# Allegro board DDS.brd
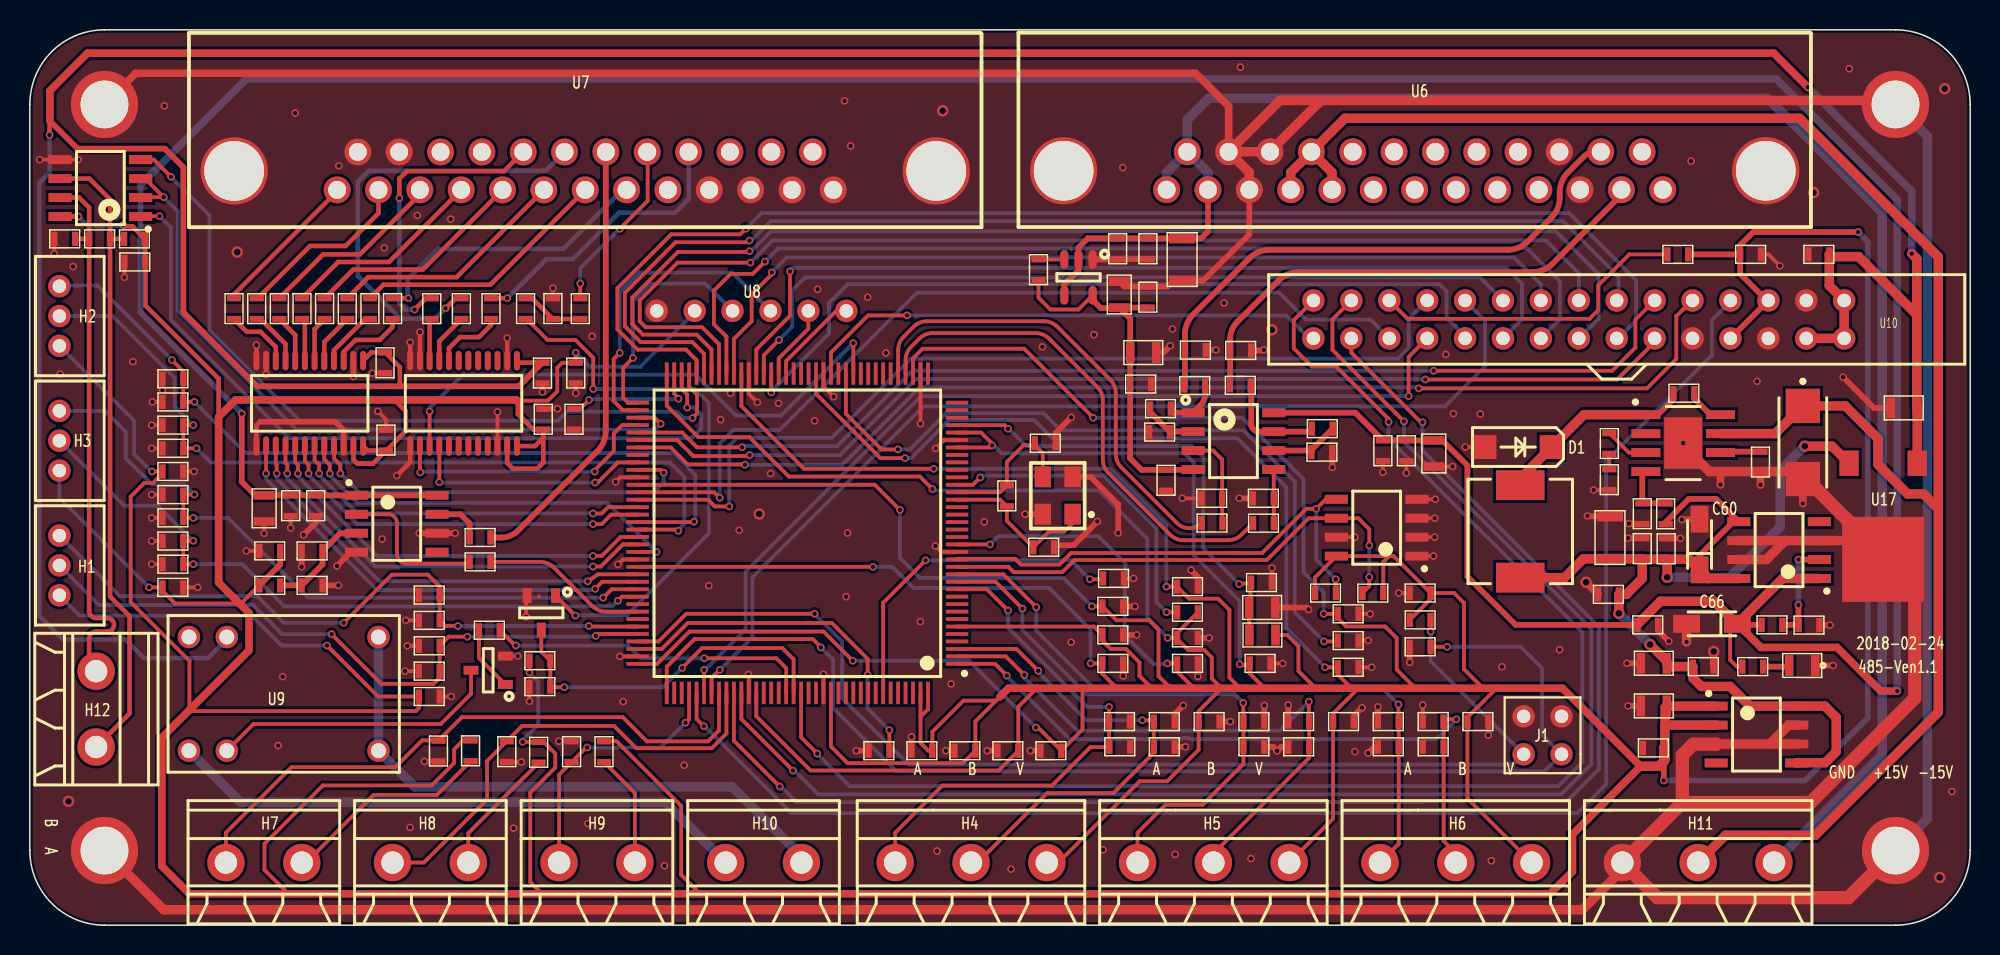
[diagram p0: board, top side]
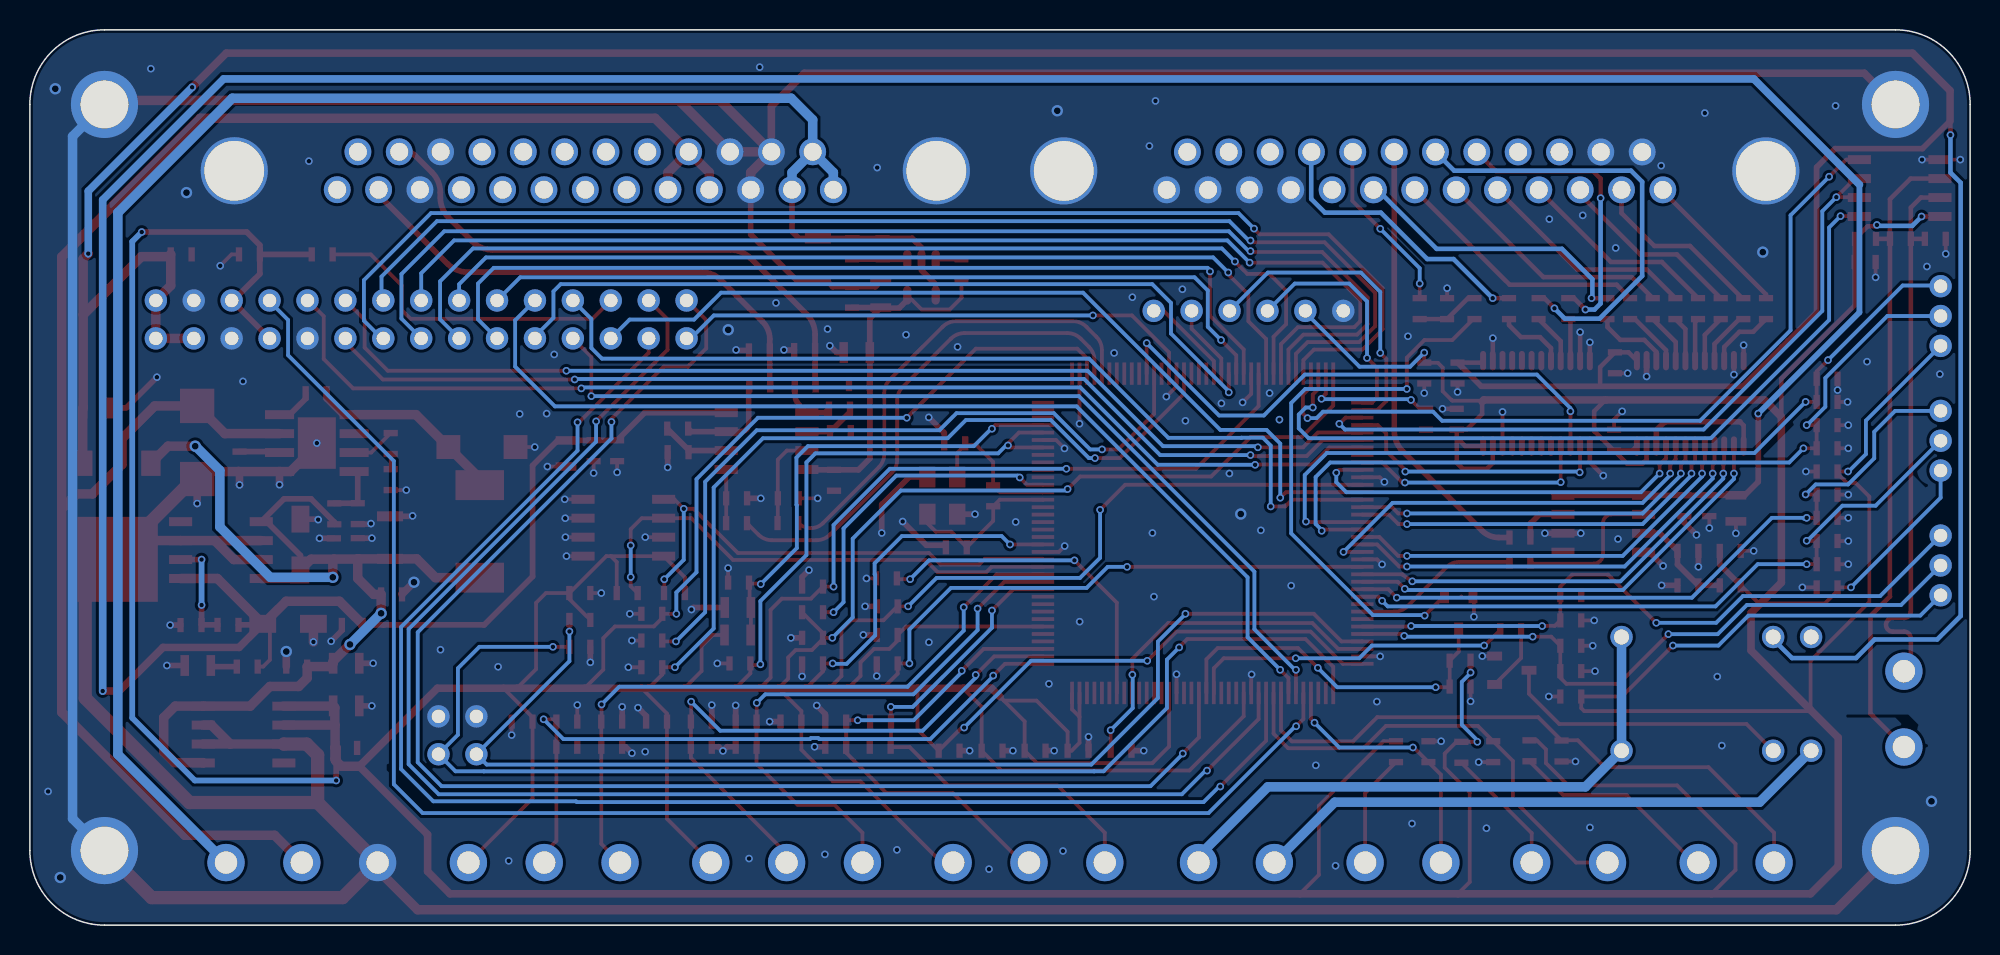
[diagram p1: board, bottom side, seen from below]

Outline 130 x 60 mm; copper layers: TOP, BOTTOM. Coordinates in mm from the lower left corner of the outline.
Outline path: 0,55 0,5 arc(1.46,1.46) 5,0 125,0 arc(128.54,1.46) 130,5 130,55 arc(128.54,58.54) 125,60 5,60 arc(1.46,58.54) 0,55

## Design rules (mm)
net group FSMC: nets N11642 N11646 N11650 N11654 N11658 N11662 N11666 N11670 N11674 N11678 N11682 N11686 N11690 N11694 N11698 N11702

## Placement (name value [footprint] x y rotation side)
C1  0.1uF  [0603]  17.47 28.11 270 top
C2  10uF  [0805]  15.7 27.93 270 top
C3  0.1uF  [0603]  16.08 25.08 0 top
C4  0.1uF  [0603]  18.91 22.77 180 top
C5  1nF  [0603]  78.09 38.54 0 top
C6  0.1uF  [0603]  92.23 31.79 270 top
C7  10uF  [0805]  94.07 31.61 270 top
C8  1nF  [0603]  81.12 38.51 0 top
C9  1nF  [0603]  79.19 28.6 0 top
C10  1nF  [0603]  82.65 28.6 0 top
C11  10uF  [0805]  82.57 21.29 0 top
C12  0.1uF  [0603]  82.52 22.96 0 top
C13  2.2uF  [0603]  36.46 33.9 90 top
C14  2.2uF  [0603]  56.89 11.69 0 top
C15  22pF  [0603]  67.93 25.33 0 top
C16  22pF  [0603]  68.04 32.3 180 top
C17  0.1uF  [0603]  77.56 22.69 180 top
C18  0.1uF  [0603]  88.33 20.86 180 top
C19  0.1uF  [0603]  72.56 21.37 180 top
C20  0.1uF  [0603]  72.56 19.45 180 top
C21  0.1uF  [0603]  72.56 17.54 180 top
C22  0.1uF  [0603]  77.56 19.26 180 top
C23  0.1uF  [0603]  82.43 17.54 180 top
C24  0.1uF  [0603]  88.33 17.28 180 top
C25  0.1uF  [0603]  77.56 17.54 180 top
C26  0.1uF  [0603]  59.77 11.69 0 top
C27  0.1uF  [0603]  62.65 11.69 0 top
C28  0.1uF  [0603]  65.53 11.69 0 top
C29  0.1uF  [0603]  68.41 11.69 0 top
C30  0.1uF  [0603]  23.86 32.51 270 top
C31  0.1uF  [0603]  34.4 33.9 270 top
C32  0.1uF  [0603]  34.35 37 90 top
C33  0.1uF  [0603]  23.8 37.69 90 top
C34  0.1uF  [0603]  26.76 20.42 0 top
C35  0.1uF  [0603]  26.76 18.72 0 top
C36  0.1uF  [0603]  9.58 36.62 0 top
C37  0.1uF  [0603]  9.58 33.51 0 top
C38  0.1uF  [0603]  9.58 28.85 0 top
C39  0.1uF  [0603]  9.58 25.74 0 top
C40  0.1uF  [0603]  73 13.64 180 top
C41  0.1uF  [0603]  76.01 13.64 180 top
C42  0.1uF  [0603]  82.01 13.64 180 top
C43  0.1uF  [0603]  85.01 13.64 0 top
C44  0.1uF  [0603]  26.76 15.32 0 top
C45  0.1uF  [0603]  9.58 30.4 0 top
C46  0.1uF  [0603]  9.58 22.64 0 top
C47  0.1uF  [0603]  79.01 13.64 0 top
C48  0.1uF  [0603]  88.01 13.64 0 top
C49  0.1uF  [0603]  91.02 13.64 0 top
C50  0.1uF  [0603]  94.02 13.64 0 top
C51  0.1uF  [0603]  34.17 15.99 180 top
C52  0.1uF  [0603]  27.38 11.67 270 top
C53  0.1uF  [0603]  31.96 11.63 270 top
C54  0.1uF  [0603]  36.3 11.63 90 top
C55  0.1uF  [0603]  97.02 13.64 0 top
C56  0.1uF  [0603]  93.15 22.26 0 top
C58  0.1uF  [0603]  36.58 37 90 top
C59  150PF  [0603]  105.82 32.28 90 top
C60  10uF10V  [CAP-3216]  111.87 23.81 90 top
C61  0.1uF  [0603]  109.63 25.22 90 top
C62  10uF35V  [CAP-6032]  118.79 32.35 270 top
C63  0.1uF  [0603]  110.82 35.65 0 top
C64  0.1uF  [0603]  108.03 25.23 90 top
C65  22uF  [1206]  105.87 25.97 270 top
C66  10uF10V  [CAP-3216]  114.4 20.19 180 top
C67  0.1uF  [0603]  108.4 20.12 0 top
C68  10uF  [0805]  108.8 17.55 180 top
C69  0.1uF  [0603]  112.12 17.33 0 top
C70  0.1uF  [0603]  108.77 11.88 180 top
C71  10uF  [0805]  108.8 14.69 180 top
C72  0.1uF  [0603]  115.29 44.95 0 top
C73  0.1uF  [0603]  119.86 44.95 180 top
C74  0.01uF  [0603]  19.15 28.11 270 top
C75  0.01uF  [0603]  90.65 31.79 270 top
C76  0.01uF  [0603]  76.12 29.81 90 top
C77  0.1uF  [0603]  74.42 36.26 180 top
C78  10uF  [0805]  74.6 38.37 180 top
C79  0.01uF  [0603]  67.58 43.93 90 top
C80  22uF  [1206]  77.2 44.6 270 top
C81  1uF  [0603]  74.91 45.33 270 top
C82  0.1uF  [0603]  72.88 45.33 270 top
C83  0.1uF  [0603]  74.91 42.09 270 top
C84  10uF  [0805]  72.99 42.26 270 top
C87  1uF  [0603]  105.77 22.17 0 top
C88  10uF  [0805]  125.55 34.66 0 top
C89  0.1uF  [0603]  7.04 44.44 180 top
D1  B340A-13-F  [SMA]  101.96 32.04 180 top
H1  Header3  [DUANZI-3P-200]  1.98 22.11 90 top
H2  Header3  [DUANZI-3P-200]  1.98 38.82 90 top
H3  Header3  [DUANZI-3P-200]  1.98 30.46 90 top
H4  Header3  [DUANZI-3P-508]  68.14 4.19 180 top
H5  Header3  [DUANZI-3P-508]  84.38 4.19 180 top
H6  Header3  [DUANZI-3P-508]  100.62 4.19 180 top
H7  Header2  [DUANZI-2P-508]  18.22 4.19 180 top
H8  Header2  [DUANZI-2P-508]  29.38 4.19 180 top
H9  Header2  [DUANZI-2P-508]  40.54 4.19 180 top
H10  Header2  [DUANZI-2P-508]  51.7 4.19 180 top
H11  Header3  [DUANZI-3P-508]  116.86 4.19 180 top
H12  Header2  [DUANZI-2P-508]  4.44 11.94 90 top
J1  Header2*2  [H-2-2]  102.62 11.45 180 top
L1  10uH  [0805]  82.58 19.44 180 top
L2  15uH  [L-7-7-3]  99.86 26.39 270 top
M1  MTG  [MTG-450-320]  5 5 0 top
M2  MTG  [MTG-450-320]  125 5 0 top
M3  MTG  [MTG-450-320]  5 55 0 top
M4  MTG  [MTG-450-320]  125 55 0 top
NOREF  -  []  0 0 0 top
NOREF#2  -  []  5 5 0 top
NOREF#3  -  []  0 0 90 top
NOREF#4  -  []  125 5 90 top
O1  8M  [OSC-3225]  68.87 28.79 180 top
Q1  S9014  [S9014-SOT23]  34.27 20.93 270 top
Q2  S9014  [S9014-SOT23]  30.71 17.08 180 top
R1  1K  [0603]  30.16 24.34 0 top
R3  50R  [0603]  30.16 25.98 180 top
R4  10K  [0603]  16.08 22.77 180 top
R5  10K  [0603]  18.91 25.08 0 top
R6  50R  [0603]  78.05 36.16 180 top
R7  50R  [0603]  81.1 36.18 0 top
R8  10K  [0603]  75.75 34.62 180 top
R9  20K  [0603]  75.69 33.05 180 top
R10  10K  [0603]  86.59 33.27 180 top
R11  50R  [0603]  79.21 26.95 180 top
R12  20K  [0603]  86.57 31.7 180 top
R13  50R  [0603]  82.65 26.94 0 top
R14  10K  [0603]  77.56 20.97 0 top
R15  1M  [0603]  65.46 28.77 270 top
R16  10K  [0603]  93.15 18.65 180 top
R17  10K  [0603]  93.15 20.45 0 top
R18  10K  [0603]  72.61 23.24 180 top
R19  10K  [0603]  88.33 19.07 180 top
R20  1K  [0603]  13.68 41.32 270 top
R21  1K  [0603]  16.72 41.32 270 top
R22  1K  [0603]  18.23 41.32 270 top
R23  1K  [0603]  21.27 41.32 270 top
R24  1K  [0603]  15.2 41.32 270 top
R25  1K  [0603]  19.75 41.32 270 top
R26  1K  [0603]  22.78 41.32 270 top
R27  1K  [0603]  24.3 41.32 270 top
R28  1K  [0603]  30.9 41.32 90 top
R29  1K  [0603]  28.91 41.32 90 top
R30  1K  [0603]  26.93 41.32 90 top
R31  10K  [0603]  26.76 22.12 180 top
R32  10K  [0603]  9.58 35.06 180 top
R33  10K  [0603]  9.58 27.3 180 top
R34  10K  [0603]  73.03 11.95 0 top
R35  10K  [0603]  82.01 11.95 0 top
R36  10K  [0603]  29.53 11.68 270 top
R37  10K  [0603]  34.09 11.58 270 top
R38  10K  [0603]  38.47 11.63 270 top
R39  10K  [0603]  34.17 17.72 0 top
R40  2K  [0603]  36.88 41.32 270 top
R41  10K  [0603]  91.02 11.95 180 top
R42  4.7K  [0603]  33.21 41.32 270 top
R43  3K  [0603]  35.05 41.32 90 top
R44  10K  [0603]  89.98 22.25 180 top
R45  10K  [0603]  86.81 22.25 0 top
R46  4.7K  [0603]  30.79 19.77 0 top
R47  20K  [0603]  108.03 27.58 270 top
R48  2.7K  [0603]  119.2 20.11 180 top
R49  130K  [0603]  109.6 27.56 90 top
R50  100K  [0603]  115.95 31.04 270 top
R51  100K  [0603]  105.82 29.86 90 top
R52  10K  [0603]  116.72 20.12 180 top
R53  2K  [0603]  115.43 17.33 180 top
R54  10K  [0603]  26.76 17.02 180 top
R55  10K  [0603]  9.58 31.96 180 top
R56  10K  [0603]  9.58 24.19 180 top
R57  10K  [0603]  76.01 11.95 0 top
R58  10K  [0603]  85.01 11.95 180 top
R59  10K  [0603]  94.02 11.95 180 top
R60  10K  [0603]  110.41 44.95 0 top
R61  360R  [0603]  7.01 45.99 180 top
R62  360R  [0603]  2.34 45.99 180 top
R63  120R  [0603]  4.67 45.99 0 top
U1  MAX903  [LM334SM-SOP8]  24.58 26.9 0 top
U2  AD8622  [LM334SM-SOP8]  80.64 32.44 0 top
U3  STM32F407ZGT6  [STM32F407ZGT6-LQFP144]  51.42 26.26 180 top
U4  74LVC4245  [74LVC4245-PW]  18.75 34.97 270 top
U5  74LVC4245  [74LVC4245-PW]  29.06 34.97 270 top
U6  DB25G  [DB25-G]  109.4 49.29 180 top
U7  DB25M  [DB25-M]  53.83 49.28 180 top
U8  0.96LCD  [OLED]  42 41.17 0 top
U9  HK4100F-DC5V-SHG  [HK4100F]  10.66 19.31 0 top
U10  TFTLCD_4_3  [TFT_LCD_4_3]  86 39.32 0 top
U11  AT24C02  [AT24C02-SOIC]  90.24 26.64 180 top
U12  MP1584  [MP1584-SOIC8]  110.77 32.31 0 top
U13  LT1963A  [LT1963-SOP8]  117.2 25.14 180 top
U14  LT1963-3.3  [LT1963-SOP8]  115.68 12.77 0 top
U15  RED  [LED0805]  118.75 17.4 0 top
U16  LT1964-5  [LT1964-5-SOT23]  70.26 43.41 270 top
U17  -  [LP38691DT-5]  126.46 30.96 180 top
U18  MAX3485ESA  [LM334SM-SOP8]  4.72 49.4 180 top

## Library data of the parts
C1-C56 C58 C59 C61 C63-C65 C67-C84 C87-C89 = Cap
C60 C62 C66 = Cap+
D1 = 1n5819
H1-H6 H11 = Header3
H7-H10 H12 = Header2
J1 = Header2*2
L1 L2 = Inductor
M1-M4 = MTG
O1 = OSC-N
Q1 Q2 = S9014
R1 R3-R63 = Res
U1 = MAX903
U2 = AD8622
U3 = STM32F407ZGT6
U4 U5 = 74LVC4245
U6 U7 = DB25
U8 = 0.96LCD
U9 = HK4100F-DC5V-SHG
U10 = TFTLCD_4_3
U11 = AT24C02
U12 = MP1584
U13 U14 = LT1963
U15 = LED
U16 = LT1964-5
U17 = LP38691DT-5
U18 = MAX3485ESA

## Footprints (pads in the part's own frame, mm; a bottom-side part is the same pattern mirrored in y, then rotated)
74LVC4245-PW
  oval 1.3x0.4 smd: 1(-2.863,3.575) 2(-2.863,2.925) 3(-2.863,2.275) 4(-2.863,1.625) 5(-2.863,0.975) 6(-2.863,0.325) 7(-2.863,-0.325) 8(-2.863,-0.975) 9(-2.863,-1.625) 10(-2.863,-2.275) 11(-2.863,-2.925) 12(-2.863,-3.575) 13(2.863,-3.575) 14(2.863,-2.925) 15(2.863,-2.275) 16(2.863,-1.625) 17(2.863,-0.975) 18(2.863,-0.325) 19(2.863,0.325) 20(2.863,0.975) 21(2.863,1.625) 22(2.863,2.275) 23(2.863,2.925) 24(2.863,3.575)
0603
  rect 0.425x0.95 smd: 1(-0.7,0) 2(0.7,0)
0805
  rect 0.575x1.4 smd: 1(-0.875,0) 2(0.875,0)
1206
  rect 0.675x1.75 smd: 1(-1.425,0) 2(1.425,0)
AT24C02-SOIC
  rect 1.55x0.6 smd: 1(-2.7,1.905) 2(-2.7,0.635) 3(-2.7,-0.635) 4(-2.7,-1.905) 5(2.7,-1.905) 6(2.7,-0.635) 7(2.7,0.635) 8(2.7,1.905)
CAP-3216
  rect 1.8x1.2 smd: 1(0,0) 2(3.4,0)
CAP-6032
  rect 2.3x2.3 smd: 1(-2.45,0) 2(2.45,0)
DB25-G
  round 1.8 hole 1.2: 1(0,0) 2(2.77,0) 3(5.54,0) 4(8.31,0) 5(11.08,0) 6(13.85,0) 7(16.62,0) 8(19.39,0) 9(22.16,0) 10(24.93,0) 11(27.7,0) 12(30.47,0) 13(33.24,0) 14(1.385,-2.54) 15(4.155,-2.54) 16(6.925,-2.54) 17(9.695,-2.54) 18(12.465,-2.54) 19(15.235,-2.54) 20(18.005,-2.54) 21(20.775,-2.54) 22(23.545,-2.54) 23(26.315,-2.54) 24(29.085,-2.54) 25(31.855,-2.54)
  round 4.5 hole 4: 26(-6.9,-1.27) 27(40.14,-1.27)
DB25-M
  round 1.8 hole 1.2: 1(33.24,0) 2(30.47,0) 3(27.7,0) 4(24.93,0) 5(22.16,0) 6(19.39,0) 7(16.62,0) 8(13.85,0) 9(11.08,0) 10(8.31,0) 11(5.54,0) 12(2.77,0) 13(0,0) 14(31.855,-2.54) 15(29.085,-2.54) 16(26.315,-2.54) 17(23.545,-2.54) 18(20.775,-2.54) 19(18.005,-2.54) 20(15.235,-2.54) 21(12.465,-2.54) 22(9.695,-2.54) 23(6.925,-2.54) 24(4.155,-2.54) 25(1.385,-2.54)
  round 4.5 hole 4: 26(-6.9,-1.27) 27(40.14,-1.27)
DUANZI-2P-508
  round 2.5 hole 1.5: 1(0,0) 2(5.08,0)
DUANZI-3P-200
  round 1.5 hole 0.9: 1(0,0) 2(2,0) 3(4,0)
DUANZI-3P-508
  round 2.5 hole 1.5: 1(0,0) 2(5.08,0) 3(10.16,0)
H-2-2
  round 1.5 hole 0.9: 1(0,0) 2(2.54,0) 3(0,-2.54) 4(2.54,-2.54)
HK4100F
  round 1.5 hole 1: 1(0,0) 2(0,-7.62) 3(2.54,0) 4(2.54,-7.62) 5(12.7,0) 6(12.7,-7.62)
L-7-7-3
  rect 2x3.25 smd: 1(-3.1,0) 2(3.1,0)
LED0805
  rect 0.575x1.4 smd: 1(-0.875,0) 2(0.875,0)
LM334SM-SOP8
  rect 1.55x0.6 smd: 1(-2.7,1.905) 2(-2.7,0.635) 3(-2.7,-0.635) 4(-2.7,-1.905) 5(2.7,-1.905) 6(2.7,-0.635) 7(2.7,0.635) 8(2.7,1.905)
LP38691DT-5
  rect 1.3x1.7 smd: 1(0,0) 2(4.57,0)
  rect 5.5x5.7 smd: 3(2.285,6.44)
LT1963-SOP8
  rect 1.55x0.6 smd: 1(-2.7,1.905) 2(-2.7,0.635) 3(-2.7,-0.635) 4(-2.7,-1.905) 5(2.7,-1.905) 6(2.7,-0.635) 7(2.7,0.635) 8(2.7,1.905)
LT1964-5-SOT23
  oval 1.25x0.55 smd: 1(-1.2,0.95) 2(-1.2,0) 3(-1.2,-0.95) 4(1.2,-0.95) 5(1.2,0.95)
MP1584-SOIC8
  rect 1.95x0.6 smd: 1(-2.5,1.905) 2(-2.5,0.635) 3(-2.5,-0.635) 4(-2.5,-1.905) 5(2.5,-1.905) 6(2.5,-0.635) 7(2.5,0.635) 8(2.5,1.905)
  rect 2.55x3.45 smd: 9(0,0)
MTG-450-320
  round 4.5 hole 3.2: 1(0,0)
OLED
  round 1.5 hole 0.9: 1(0,0) 2(2.54,0) 3(5.08,0) 4(7.62,0) 5(10.16,0) 6(12.7,0)
OSC-3225
  rect 1.1x1.4 smd: 1(-1,1.25) 2(-1,-1.25) 3(1,-1.25) 4(1,1.25)
S9014-SOT23
  rect 1x0.6 smd: 1(-1.15,0.95) 2(-1.15,-0.95) 3(1.15,0)
SMA
  rect 1.6x1.6 smd: 1(0,0) 2(4.5,0)
STM32F407ZGT6-LQFP144
  rect 1.5x0.254 smd: 1(-10.7,8.75) 2(-10.7,8.25) 3(-10.7,7.75) 4(-10.7,7.25) 5(-10.7,6.75) 6(-10.7,6.25) 7(-10.7,5.75) 8(-10.7,5.25) 9(-10.7,4.75) 10(-10.7,4.25) 11(-10.7,3.75) 12(-10.7,3.25) 13(-10.7,2.75) 14(-10.7,2.25) 15(-10.7,1.75) 16(-10.7,1.25) 17(-10.7,0.75) 18(-10.7,0.25) 19(-10.7,-0.25) 20(-10.7,-0.75) 21(-10.7,-1.25) 22(-10.7,-1.75) 23(-10.7,-2.25) 24(-10.7,-2.75) 25(-10.7,-3.25) 26(-10.7,-3.75) 27(-10.7,-4.25) 28(-10.7,-4.75) 29(-10.7,-5.25) 30(-10.7,-5.75) 31(-10.7,-6.25) 32(-10.7,-6.75) 33(-10.7,-7.25) 34(-10.7,-7.75) 35(-10.7,-8.25) 36(-10.7,-8.75) 73(10.7,-8.75) 74(10.7,-8.25) 75(10.7,-7.75) 76(10.7,-7.25) 77(10.7,-6.75) 78(10.7,-6.25) 79(10.7,-5.75) 80(10.7,-5.25) 81(10.7,-4.75) 82(10.7,-4.25) 83(10.7,-3.75) 84(10.7,-3.25) 85(10.7,-2.75) 86(10.7,-2.25) 87(10.7,-1.75) 88(10.7,-1.25) 89(10.7,-0.75) 90(10.7,-0.25) 91(10.7,0.25) 92(10.7,0.75) 93(10.7,1.25) 94(10.7,1.75) 95(10.7,2.25) 96(10.7,2.75) 97(10.7,3.25) 98(10.7,3.75) 99(10.7,4.25) 100(10.7,4.75) 101(10.7,5.25) 102(10.7,5.75) 103(10.7,6.25) 104(10.7,6.75) 105(10.7,7.25) 106(10.7,7.75) 107(10.7,8.25) 108(10.7,8.75)
  rect 0.254x1.5 smd: 37(-8.75,-10.7) 38(-8.25,-10.7) 39(-7.75,-10.7) 40(-7.25,-10.7) 41(-6.75,-10.7) 42(-6.25,-10.7) 43(-5.75,-10.7) 44(-5.25,-10.7) 45(-4.75,-10.7) 46(-4.25,-10.7) 47(-3.75,-10.7) 48(-3.25,-10.7) 49(-2.75,-10.7) 50(-2.25,-10.7) 51(-1.75,-10.7) 52(-1.25,-10.7) 53(-0.75,-10.7) 54(-0.25,-10.7) 55(0.25,-10.7) 56(0.75,-10.7) 57(1.25,-10.7) 58(1.75,-10.7) 59(2.25,-10.7) 60(2.75,-10.7) 61(3.25,-10.7) 62(3.75,-10.7) 63(4.25,-10.7) 64(4.75,-10.7) 65(5.25,-10.7) 66(5.75,-10.7) 67(6.25,-10.7) 68(6.75,-10.7) 69(7.25,-10.7) 70(7.75,-10.7) 71(8.25,-10.7) 72(8.75,-10.7) 109(8.75,10.7) 110(8.25,10.7) 111(7.75,10.7) 112(7.25,10.7) 113(6.75,10.7) 114(6.25,10.7) 115(5.75,10.7) 116(5.25,10.7) 117(4.75,10.7) 118(4.25,10.7) 119(3.75,10.7) 120(3.25,10.7) 121(2.75,10.7) 122(2.25,10.7) 123(1.75,10.7) 124(1.25,10.7) 125(0.75,10.7) 126(0.25,10.7) 127(-0.25,10.7) 128(-0.75,10.7) 129(-1.25,10.7) 130(-1.75,10.7) 131(-2.25,10.7) 132(-2.75,10.7) 133(-3.25,10.7) 134(-3.75,10.7) 135(-4.25,10.7) 136(-4.75,10.7) 137(-5.25,10.7) 138(-5.75,10.7) 139(-6.25,10.7) 140(-6.75,10.7) 141(-7.25,10.7) 142(-7.75,10.7) 143(-8.25,10.7) 144(-8.75,10.7)
TFT_LCD_4_3
  round 1.5 hole 0.9: 1(0,2.54) 2(0,0) 3(2.54,2.54) 4(2.54,0) 5(5.08,2.54) 6(5.08,0) 7(7.62,2.54) 8(7.62,0) 9(10.16,2.54) 10(10.16,0) 11(12.7,2.54) 12(12.7,0) 13(15.24,2.54) 14(15.24,0) 15(17.78,2.54) 16(17.78,0) 17(20.32,2.54) 18(20.32,0) 19(22.86,2.54) 20(22.86,0) 21(25.4,2.54) 22(25.4,0) 23(27.94,2.54) 24(27.94,0) 25(30.48,2.54) 26(30.48,0) 27(33.02,2.54) 28(33.02,0) 29(35.56,2.54) 30(35.56,0)

## Nets
GND: C1.2 C2.2 C3.1 C4.1 C5.2 C6.2 C7.2 C8.2 C9.1 C10.1 C11.2 C12.2 C13.1 C14.1 C15.2 C16.1 C17.1 C18.1 C19.1 C20.1 C21.1 C22.1 C23.1 C24.1 C25.1 C26.1 C27.1 C28.1 C29.1 C30.1 C31.1 C32.1 C33.1 C34.1 C35.1 C36.1 C37.1 C38.1 C39.1 C40.1 C41.1 C42.1 C43.1 C44.2 C45.2 C46.2 C47.2 C48.2 C49.1 C50.1 C51.2 C52.2 C53.2 C54.2 C55.2 C56.1 C58.1 C60.2 C61.2 C62.2 C64.2 C65.1 C66.2 C67.2 C68.2 C69.2 C70.2 C71.2 C72.2 C73.2 C74.2 C75.2 C76.1 C77.1 C78.1 C80.2 C81.2 C82.2 C83.1 C84.1 C87.1 C88.1 C89.2 D1.2 H11.3 J1.3 J1.4 M1.1 M2.1 M3.1 M4.1 O1.2(GND1) O1.4(GND2) Q1.2(E) Q2.2(E) R5.1 R9.2 R12.1 R16.2 R18.1 R19.1 R31.2 R32.2 R33.2 R34.2 R35.2 R41.2 R43.2 R47.2 R48.1 R50.2 R51.1 R54.2 R55.2 R56.2 R57.2 R58.2 R59.2 R62.2 U1.4(VEE) U1.6(GND) U3.16(VSS1) U3.31(VSSA) U3.38(VSS2) U3.51(VSS3) U3.61(VSS4) U3.83(VSS5) U3.94(VSS6) U3.107(VSS7) U3.120(VSS8) U3.130(VSS9) U4.2(DIR) U4.11(GND1) U4.12(GND2) U4.13(GND3) U4.22(O\E\) U5.2(DIR) U5.11(GND1) U5.12(GND2) U5.13(GND3) U5.22(O\E\) U6.3 U6.11 U6.16 U6.23 U6.24 U6.26 U6.27 U7.10 U7.11 U7.12 U7.13 U7.14 U7.15 U7.26 U7.27 U8.1(GND) U10.22(GND2) U10.26(GND3) U10.27(GND1) U11.1(A0) U11.2(A1) U11.3(A2) U11.4(GND) U11.7(WP) U12.5(GND) U12.9(GND-PAD) U13.3(GND1) U13.6(GND2) U13.7(GND3) U14.3(GND1) U14.6(GND2) U14.7(GND3) U15.2 U16.1(GND) U17.3(GND) U18.5(GND)
VCC5: C32.2 C33.2 C73.1 C88.2 U4.1(VCC(A)) U5.1(VCC(A)) U9.3 U10.28(BL_VDD1) U10.29(BL_VDD3) U10.30(BL_VDD2) U17.1(VOUT)
VCC5.6: C1.1 C2.1 C6.1 C7.1 C66.1 C67.1 C74.1 C75.1 R52.2 R53.2 U1.1(VCC) U1.8(VDD) U2.8(V+) U13.1(OUT)
VCC15: C62.1 H11.2 U6.9 U6.10 U6.22 U12.7(VIN)
VCC-5: C76.2 C77.2 C78.2 C79.1 C83.2 C84.2 U2.4(V-) U16.5(OUT)
VCC-15: C80.1 C81.1 C82.1 H11.1 U6.12 U6.13 U6.25 U16.2(IN) U16.4(S\H\D\N\)
VDD3.3: C3.2 C17.2 C18.2 C19.2 C20.2 C21.2 C22.2 C23.2 C24.2 C25.2 C26.2 C27.2 C28.2 C29.2 C30.2 C31.2 C44.1 C45.1 C46.1 C47.1 C48.1 C55.1 C56.2 C58.2 C70.1 C71.1 C72.1 C89.1 H1.1 H2.1 H3.1 H4.1 H5.1 H6.1 L1.1 R4.2 R14.2 R17.1 R36.1 R37.1 R38.1 R39.1 R44.1 R45.1 R60.2 R61.1 U3.6(VBAT) U3.17(VDD1) U3.30(VDD2) U3.32(VREF+) U3.39(VDD3) U3.52(VDD4) U3.62(VDD5) U3.72(VDD6) U3.84(VDD7) U3.95(VDD8) U3.108(VDD9) U3.121(VDD10) U3.131(VDD11) U3.143(PDR_ON) U3.144(VDD12) U4.23(VCC(B)2) U4.24(VCC(B)1) U5.23(VCC(B)2) U5.24(VCC(B)1) U8.2(VCC) U10.24(VDD3.3_2) U10.25(VDD3.3_1) U11.8(VCC) U14.1(OUT) U14.2(SENSE/ADJ) U18.8(VCC)
BOOT0: R18.2 U3.138(BOOT0)
BOOT1: R19.2 U3.48(PB2/BOOT1)
OSC_IN: C15.1 O1.1(X1) R15.2 U3.23(OSC_IN)
OSC_OUT: C16.2 O1.3(X2) R15.1 U3.24(OSC_OUT)
RELAYC: R40.1 U7.21
TCK: J1.1 R16.1 U3.109(PA14/JTCK)
TMS: J1.2 R17.2 U3.105(PA13/JTMS)
VCAP_1: C13.2 U3.71(VCAP_1)
VCAP_2: C14.2 U3.106(VCAP_2)
N00261: R1.2 U3.101(PA9)
N00265: R11.2 U3.41(PA5)
N00269: R13.1 U3.40(PA4)
N00322: U3.82(PD13) U4.21(B1)
N00366: U3.93(PG8) U4.20(B2)
N00370: U3.87(PG2) U4.19(B3)
N00374: U3.88(PG3) U4.18(B4)
N00378: U3.91(PG6) U4.17(B5)
N00382: U3.92(PG7) U4.16(B6)
N00386: U3.96(PC6) U4.15(B7)
N00394: U3.97(PC7) U4.14(B8)
N00427: U3.76(PB15) U5.14(B8)
N00431: U3.47(PB1) U5.15(B7)
N00435: U3.81(PD12) U5.16(B6)
N00439: C34.2 H1.3 R31.1 U3.103(PA11)
N00443: C35.2 H1.2 R54.1 U3.104(PA12)
N00447: C36.2 H2.3 R32.1 U3.89(PG4)
N00451: C37.2 H2.2 R55.1 U3.90(PG5)
N00455: C38.2 H3.3 R33.1 U3.98(PC8)
N00459: C39.2 H3.2 R56.1 U3.99(PC9)
N00463: C40.2 H4.3 R34.1 U3.11(PF1)
N00467: C41.2 H4.2 R57.1 U3.3(PE4)
N00471: C42.2 H5.3 R35.1 U3.12(PF2)
N00475: C43.2 H5.2 R58.1 U3.2(PE3)
N00479: C49.2 H6.3 R41.1 U3.13(PF3)
N00483: C50.2 H6.2 R59.1 U3.1(PE2)
N00487: C52.1 H7.2 U3.116(PD2)
N00491: C53.1 H8.2 U3.117(PD3)
N00495: C54.1 H9.2 U3.112(PC11)
N00499: R46.2 U3.125(PG10)
N00503: C51.1 Q1.3(C) R39.2 U3.126(PG11)
N00507: U3.74(PB13) U8.4(SDA)
N00511: U3.73(PB12) U8.3(SCL)
N00515: U3.56(PG0) U8.6(D/C)
N00519: U3.57(PG1) U8.5(RST)
N00543: R44.2 U3.14(PF4) U11.6(SCL)
N00553: R45.2 U3.15(PF5) U11.5(SDA)
N000601: R1.1 U1.2(IN+)
N001382: R27.2 U4.3(A1)
N001383: R26.2 U4.4(A2)
N001384: R23.2 U4.5(A3)
N001385: R25.2 U4.6(A4)
N001386: R22.2 U4.7(A5)
N001387: R21.2 U4.8(A6)
N001388: R24.2 U4.9(A7)
N001389: R20.2 U4.10(A8)
N001987: R28.1 U5.8(A6)
N001988: R29.1 U5.9(A7)
N001989: R30.1 U5.10(A8)
N11642: U3.85(PD14) U10.6(DB0)
N11646: U3.86(PD15) U10.7(DB1)
N11650: U3.114(PD0) U10.8(DB2)
N11654: U3.115(PD1) U10.9(DB3)
N11658: U3.58(PE7) U10.10(DB4)
N11662: U3.59(PE8) U10.11(DB5)
N11666: U3.60(PE9) U10.12(DB6)
N11670: U3.63(PE10) U10.13(DB7)
N11674: U3.64(PE11) U10.14(DB8)
N11678: U3.65(PE12) U10.15(DB9)
N11682: U3.66(PE13) U10.16(DB10)
N11686: U3.67(PE14) U10.17(DB11)
N11690: U3.68(PE15) U10.18(DB12)
N11694: U3.77(PD8) U10.19(DB13)
N11698: U3.78(PD9) U10.20(DB14)
N11702: U3.79(PD10) U10.21(DB15)
N11706: U3.50(PF12) U10.2(RS)
N11710: U3.118(PD4) U10.4(RD)
N11714: U3.127(PG12) U10.1(CS)
N11718: U3.119(PD5) U10.3(WR)
N11722: U3.113(PC12) U10.23(BL)
N11726: C5.1 R6.2 U6.15
N11738: C8.1 R7.1 U6.2
N11750: R3.1 U7.20
N18066: U3.69(PB10) U18.4(DI)
N18070: U3.70(PB11) U18.1(RO)
N18074: U3.75(PB14) U18.2(R\E\) U18.3(DE)
N0056914: R14.1 U3.25(NRST)
N127673: C4.2 R4.1 R5.2 U1.3(IN-)
N127709: R20.1 U7.1
N127713: R24.1 U7.2
N127717: R21.1 U7.3
N127721: R22.1 U7.4
N127725: R25.1 U7.5
N127729: R23.1 U7.6
N127733: R26.1 U7.7
N127737: R27.1 U7.8
N129107: Q2.1(B) R46.1
N129275: H10.2 U9.2
N129286: H10.1 U9.5 U9.6
N190842: C60.1 C61.1 C64.1 C65.2 C68.1 C69.1 C87.2 L2.2 R49.1 U13.5(S\H\D\N\) U13.8(IN) U14.5(S\H\D\N\) U14.8(IN) U17.2(VIN)
N190898: C63.1 D1.1 L2.1 U12.1(SW)
N190958: C63.2 U12.8(BST)
N191018: C59.2 U12.3(COMP)
N191038: C59.1 R51.2
N191046: R47.1 R49.2 U12.4(FB)
N191114: R50.1 U12.6(FREQ)
N191854: R48.2 R52.1 U13.2(SENSE/ADJ)
N193322: R3.2 U1.7(OUT)
N193887: R8.2 R9.1 U2.2(-IN A)
N194020: R6.1 R8.1 U2.1(OUTA)
N194103: C9.2 R11.1 U2.3(+IN A)
N195216: R10.1 R12.2 U2.6(-IN B)
N195228: R7.2 R10.2 U2.7(OUTB)
N195578: C10.2 R13.2 U2.5(+IN B)
N206667: C79.2 U16.3(BYP)
N216832: R29.2 U7.19
N216844: R30.2 U7.18
N216856: R28.2 U7.22
N217116: R40.2 R42.1 R43.1
N217120: Q1.1(B) R42.2
N221620: H7.1 R36.2
N221870: H8.1 R37.2
N222112: H9.1 R38.2
N227993: R60.1 U10.5(RST)
N229143: C11.1 C12.1 L1.2 U3.33(VDDA)
N233408: H12.2 R62.1 R63.1 U18.7(B)
N233412: H12.1 R61.2 R63.2 U18.6(A)
N1287604: Q2.3(C) U9.4
N2019270: R53.1 U15.1

Pads without a net: U1 5; U3 4 5 7 8 9 10 18 19 20 21 22 26 27 28 29 34 35 36 37 42 43 44 45 46 49 53 54 55 80 100 102 110 111 122 123 124 128 129 132 133 134 135 136 137 139 140 141 142; U5 3 4 5 6 7 17 18 19 20 21; U6 1 4 5 6 7 8 14 17 18 19 20 21; U7 9 16 17 23 24 25; U9 1; U12 2; U13 4; U14 4

## Via types
v1: diameter 0.508, hole 0.305, TOP to BOTTOM, 342 vias
v2: diameter 0.762, hole 0.457, TOP to BOTTOM, 15 vias

## Routing (per net, layer and track width the routed paths; a pad name or vN(x,y) marks a point on that pad's centre or on a via; arc(x,y) is an arc through that point)
GND: length 566
  TOP w0.254: v1(60.67,25.41) 61.06,25.01 U3.16 ; U11.3 v1(94.13,27.27) ; C38.1 v1(8.16,28.85) ; U11.2 v1(94.12,26) ; C44.2 v1(28.23,15.32) ; 46.94,35.81 v1(46.94,35.65) ; R62.2 v1(1.64,44.99) ; U3.94 39.74,24.51 v1(39.4,24.18) ; Q1.2 33.25,22.01 v1(33.25,20.67) ; C9.1 v1(77.22,28.6) ; C1.2 v1(17.47,26.61) ; U5.22 v1(31.33,34.4) ; U3.38 v1(59.67,33.61) ; C3.1 v1(14.5,25.08) ; C53.2 v1(32.93,10.93) ; C34.1 v1(25.19,20.42) ; v1(39.25,29.7) 39.55,30.01 U3.83 ; C89.2 v1(6.34,43.41) ; U3.107 v1(39.53,18.01) ; v1(53.85,35.42) 53.17,36.1 U3.51 ; C24.1 v1(89.9,17.28) ; C56.1 v1(91.72,22.26) ; v1(60.68,31.95) 61.25,32.51 U3.31 ; v1(0.66,51.3) U18.5 v1(3.23,51.3) ; C50.1 v1(93.32,14.75) ; C54.2 v1(35.44,12.33) ; C18.1 v1(89.8,20.86) ; Q2.2 v1(32.69,18.03) ; C23.1 v1(83.94,17.54) ; D1.2 v1(96.17,32.04) ; v1(48.75,35.03) 48.17,35.61 U3.61 ; C45.2 v1(11.01,30.4) ; R32.2 v1(8.21,35.06) ; R51.1 v1(104.78,29.16) ; C30.1 23.86,33.9 v1(23.32,34.44) ; U11.4 v1(94.17,28.54) ; v1(48.14,16.8) 48.17,16.77 U3.120 ; U3.130 v1(53.17,16.81) ; v1(117.25,44.19) 116.48,44.95 C72.2 ; C36.1 v1(8.88,35.86) ; C55.2 v1(97.72,12.74) ; C7.2 v1(95.33,30.73) ; U11.7 v1(88.77,26) ; U11.1 v1(94.05,24.73) ; C12.2 v1(83.22,23.93) ; C39.1 v1(8.16,25.74) ; R18.1 v1(73.95,23.24) ; C51.2 v1(33.47,15) ; R56.2 v1(8.16,24.19) ; C6.2 v1(92.23,30.3) ; R54.2 v1(25.13,17.02) ; R33.2 v1(8.16,27.3) ; C46.2 v1(11.24,22.64) ; C58.1 v1(36.58,35.66) ; C32.1 v1(34.35,35.73) ; C37.1 v1(8.16,33.51) ; R55.2 v1(8.16,31.96) ; C33.1 v1(22.95,36.99) ; C52.2 v1(26.44,10.97) ; C2.2 v1(15.7,26.26) ; R43.2 v1(35.05,42.69) ; C75.2 v1(90.65,30.35) ; C35.1 v1(25.29,18.72) ; R19.1 v1(89.67,19.07)
  TOP w0.305: U5.13 25.48,31.03 v1(24.58,30.12) ; U4.11 v1(15.83,36.9) ; U5.12 v1(25.48,39.06) ; U4.13 15.18,33.49 15.42,33.73 ; U5.2 v1(31.98,39.34) ; U4.12 v1(15.18,38.87) ; C31.1 v1(35.35,34.6) ; U5.11 v1(26.13,39.74)
  TOP w0.381: C20.1 v1(74.16,19.45) ; C29.1 v1(67.03,11.69) ; v1(109.81,19.03) 109.1,19.74 C67.2 ; R47.2 107.18,26.88 v1(107.15,26.91) ; C41.1 76.71,14.15 v1(77.28,14.72) ; C10.1 v1(81.03,28.6) ; v1(89.66,11.52) 90.09,11.95 R41.2 ; C28.1 v1(64.14,11.69) ; C61.2 v1(110.6,25.92) ; C26.1 v1(59.07,12.62) ; R58.2 83.84,11.95 v1(83.57,11.68) 83.29,11.95 R35.2 ; v1(77.8,23.79) 78.26,23.33 C17.1 ; v1(79.48,38.55) 79.46,38.54 C5.2 ; 15.42,33.73 20.46,33.73 21.03,33.17 U4.22 ; v1(69.77,34.03) 68.74,32.99 C16.1 ; R57.2 v1(77.42,11.95) ; C71.2 v1(107.09,14.69) ; C42.1 v1(82.71,14.73) ; C14.1 v1(55.37,11.69) ; C47.2 v1(80.43,13.64) ; C27.1 v1(61.37,11.69) ; R48.1 v1(120.6,20.11) ; v1(26.09,26.26) U1.6 v1(28.49,26.26) ; v1(82.68,38.55) 82.65,38.51 C8.2 ; C68.2 v1(107,17.55) ; v1(89.26,14.57) 88.71,14.03 C48.2 ; C43.1 v1(84.31,14.75) ; v1(18.34,26.16) 19.15,26.97 C74.2 ; U4.2 v1(21.68,36.77) ; C84.1 73.34,42.79 C83.1 76.21,42.79 76.6,43.18 C80.2 78.59,43.18 81.7,46.29 U6.11 ; C22.1 v1(79.01,19.26) ; C78.1 75.95,38.37 v1(76.4,38.83) ; R5.1 v1(18.21,24.02) ; C81.2 C82.2 72.86,44.61 U16.1 ; U1.4 21.5,24.99 v1(20.57,24.07) ; v1(121.49,36.72) 123.55,34.66 C88.1 ; v1(85.67,21.15) 85.54,21.29 C11.2 ; C64.2 v1(107.09,25.93) ; C49.1 v1(90.32,14.63) ; C65.1 104.39,27.4 v1(104.36,27.43) ; v1(71.52,27.05) 69.93,25.46 68.76,25.46 C15.2 ; v1(66.68,27.54) O1.4 ; R12.1 v1(87.27,30.68) ; C60.2 110.71,27.21 v1(110.68,27.18) ; C4.1 v1(20.67,22.77) ; C25.1 v1(78.26,16.67) ; C19.1 v1(74.04,21.37) ; O1.2 71.07,30.04 72.92,28.19 v1(72.92,26.28) ; U15.2 v1(120.82,17.4) ; R16.2 v1(92.45,17.61) ; C21.1 v1(73.26,16.7)
  TOP w0.508: M3.1 7.09,57.09 78.1,57.09 80.32,54.88 U6.24 ; v2(104.27,22.98) 105.07,22.18 C87.1 ; U12.5 v1(113.27,29.52) ; R50.2 v1(115.95,29.51) ; C62.2 v1(118.79,28.26) ; C69.2 v2(112.82,18.34)
  TOP w0.635: 116.57,12.14 117.84,13.41 U14.7 ; 116.57,12.14 U14.6 ; 116.57,12.14 U14.3 ; 117.61,25.77 U13.3 123.16,25.77 ; 117.61,25.77 116.34,24.5 U13.7 ; 117.61,25.77 U13.6 ; 86.51,55.27 83.09,51.85 U6.23 U6.24 ; 86.51,55.27 83.77,55.27 U6.24 ; 86.51,55.27 124.73,55.27 M4.1 ; C62.2 118.29,30.4 116.01,30.4 116.01,30.4 U12.5 112.53,30.4 111.54,31.4 111.54,31.9 111.13,32.31 v1(110.77,32.31) ; U6.24 81.7,50.44 U6.11 ; H11.3 106.7,3.71 104.02,1.03 8.97,1.03 M1.1 ; C66.2 v1(111,18.98)
  TOP w0.889: 110.72,8.22 H11.3 109.05,1.85 121.85,1.85 v2(125,5) ; 110.72,8.22 110.72,11.4 111.45,12.13 112.98,12.13 U14.3 ; 110.72,8.22 119.3,8.22 126.29,15.21 126.29,22.64 119.03,29.9
  BOTTOM w0.635: M4.1 127.14,52.86 127.14,7.14 v2(125,5)
  vias: v1(2.03,36.92) v1(2.9,44.14) v1(6.91,37.76) v1(9.02,54.91) v1(16.64,12.03) v1(16.94,16.66) v1(17.78,54.43) v1(20.7,50.89) v1(23.6,25.88) v1(23.75,45.38) v1(25.48,6.55) v1(25.96,47.57) v1(28.19,47.31) v1(32.41,6.5) v1(37.4,6.81) v1(37.67,39.46) v1(39.75,14.98) v1(42.52,3.98) v1(43.84,10.71) v1(45.49,22.75) v1(46.28,33.88) v1(47.52,26.46) v1(49.63,30.27) v1(50.16,34.97) v1(52.58,33.8) v1(52.78,42.61) v1(54.58,55.24) v1(54.69,22.02) v1(54.79,26.28) v1(54.99,52.22) v1(56.13,42.08) v1(57.35,38.35) v1(59.66,20.34) v1(60.78,4.97) v1(61.72,16.17) v1(63.95,27.02) v1(65.73,3.75) v1(67.84,38.75) v1(69.76,18.96) v1(71.3,39.57) v1(71.91,5.05) v1(73.23,50.77) v1(76.56,39.95) v1(76.73,4.74) v1(80.01,41.7) v1(81.1,57.5) v1(81.81,4.46) v1(88.77,11.63) v1(94.87,38.25) v1(95.38,34.28) v1(97.18,34.26) v1(97.92,4.31) v1(98.63,17.32) v1(102.49,18.46) v1(111.3,51.2) v1(115.72,36.44) v1(121.89,57.4) v1(128.78,8.96) v2(2.59,8.3) v2(13.89,45.1) v2(48.87,27.55) v2(61.16,54.58) v2(83.21,39.9) v2(119.51,49.09) v2(127.96,3.19) v2(128.29,56.05)
VCC5: length 266.9
  TOP w0.305: 24.79,36.11 24.79,37.4 C33.2 22.88,38.39 U4.1 ; v1(1.32,52.95) 1.32,53.87 1.35,53.89 ; C32.2 32.77,37.69 U5.1
  TOP w0.381: C32.2 32.76,36.11 15.24,36.11 12.61,38.74 12.23,39.12 12.23,39.12 10.29,41.07 10.29,50.79 9.04,52.04 3.2,52.04 1.35,53.89
  TOP w0.508: v1(119.13,56.15) 116.84,58.44 3.86,58.44 1.35,55.92 1.35,53.89
  TOP w0.635: U10.28 U10.30 U10.29 120.56,42.86 C73.1 120.71,44.8 122.53,44.8 126.43,40.9 ; 126.43,40.9 C88.2 126.46,34.63 U17.1 ; 126.43,40.9 126.43,44.66 v1(126.09,45)
  BOTTOM w0.305: U9.3 13.2,19.16 11.94,17.9 7.64,17.9 6.4,19.14 2.21,19.14 0.63,20.72 0.63,49.75 1.32,50.44 v1(1.32,52.95)
  BOTTOM w0.508: v1(119.13,56.15) 126.09,49.19 v1(126.09,45)
VCC5.6: length 260.2
  TOP w0.254: C66.1 113.92,19.71 113.92,17.77 114.37,17.33 R53.2
  TOP w0.381: v1(14.2,34.28) 14.2,29.71 15.1,28.81 C2.1 17.47,28.81 C1.1 C74.1 19.16,28.8 U1.1 U1.8 ; R52.2 114.47,20.12 ; U2.8 88.8,34.34 C75.1 C6.1 92.24,32.48 C7.1 94.64,32.48 96.32,30.8 96.32,23.36 99.55,20.12 106.31,20.12 106.31,20.12 106.95,20.12 106.95,20.12 C67.1
  TOP w0.508: C66.1 115.98,18.61 121.08,18.61 124,15.69 v1(125.12,15.69)
  TOP w0.635: U13.1 117.44,23.23 C66.1 114.34,20.19 112.83,21.71 109.26,21.71 107.7,20.15 C67.1
  BOTTOM w0.381: v1(14.2,34.28) 7.42,41.07 7.42,49.63
  BOTTOM w0.508: v1(125.12,15.69) 125.12,48.61 117.02,56.71 14.5,56.71 7.42,49.63
VCC15: length 123
  TOP w0.635: 127.86,27.91 126.87,28.9 125.81,28.9 123.82,30.88 123.82,32.61 121.64,34.8 C62.1 116.93,32.94 U12.7 ; 127.86,27.91 127.86,14.27 119.62,6.02 113.61,6.02 H11.2 ; 127.86,27.91 127.86,44.79 118.58,54.07 88.11,54.07 U6.22 ; U6.10 84.47,50.44 U6.22 ; U6.22 87.24,50.44 U6.9
VCC-5: length 24.8
  TOP w0.254: U16.5 70.25,41.26 68.37,41.26 67.58,42.05 C79.1
  TOP w0.381: C84.2 72.99,41.39 C83.2 ; C84.2 73.72,40.65 C78.2 73.72,38.37 C77.2 73.72,31.27 74.48,30.51 C76.2 77.92,30.51 U2.4 ; C84.2 72.95,41.35 71.76,41.35 71.21,41.9 U16.5
VCC-15: length 120.8
  TOP w0.381: U6.12 78.93,46.49 78.47,46.03 C80.1 74.91,46.03 C81.1 C82.1 70.89,46.03 70.25,45.4 70.25,44.62 U16.2 70.26,43.88 69.31,42.93 U16.4
  BOTTOM w0.635: U6.25 76.16,50.44 U6.13 ; U6.25 77.55,53.97 78.99,55.42 116.43,55.42 124.1,47.75 124.1,11.44 H11.1 ; U6.25 78.93,50.44 U6.12
VDD3.3: length 1026.3
  TOP w0.254: v1(8.18,30.4) C45.1 8.88,30.26 8.25,29.64 7.67,29.64 6.76,28.72 6.76,21.65 10.69,17.71 10.69,14.42 10.77,14.34 25.86,14.34 26.06,14.55 C44.1 23.33,15.32 v1(19.91,18.74) ; U3.95 v1(56.49,24.01) ; v1(81.06,17.48) 81.11,17.48 81.16,17.43 81.62,17.43 C23.2 81.73,16.88 82.73,15.88 ; 77.99,15.88 76.86,17.01 C25.2 v1(76.21,17.54) ; R44.1 90.68,24.34 91.07,24.73 ; 64.74,15.05 64.99,15.29 ; 64.74,15.05 63.35,13.65 C27.2 62.51,10.86 54.79,10.86 53.67,11.97 U3.131 ; 64.74,15.05 62.55,15.05 60.47,12.96 C26.2 60.2,11.69 59.67,12.22 59.67,13.96 ; 98.27,15.88 96.32,13.93 C55.1 96.32,8.49 H6.1 ; v1(55.13,17.72) 53.18,19.67 44.19,19.67 42.03,17.51 U3.108 ; U3.121 48.67,14 52.31,10.37 64.9,10.37 C28.2 66.23,14.64 67.47,15.88 ; U3.39 59.17,37.99 59.82,38.63 66.62,38.63 v1(71.25,34) ; U3.84 56.61,29.51 v1(58.29,27.83) ; 44.91,2.1 43.64,3.37 43.64,7.99 39.3,12.33 R38.1 ; 76.43,15.88 75.62,16.69 75.62,19.8 74.99,20.43 72.8,20.43 71.87,21.37 C19.2 v1(71.16,21.37) ; 91.07,24.73 91.38,24.73 C56.2 ; 91.07,24.73 U11.8 86.11,23.31 R45.1 ; 88.55,15.88 87.63,16.8 C24.2 v1(86.78,17.28) ; v1(60.56,30.58) 51.87,30.59 47.67,34.79 U3.62 ; C22.2 v1(76.23,19.26) ; C22.2 76.86,19.18 77.6,18.44 78.69,18.44 79.19,17.94 79.19,16.52 79.84,15.88 78.31,14.35 C47.1 78.31,11.75 76.19,9.64 74.35,9.64 68.93,4.22 68.16,4.22 H4.1 ; C22.2 76.86,19.57 R14.2 ; v1(36.58,38.37) C58.2 36.56,37.69 35.66,37.69 35.34,37.37 35.34,35.78 34.75,35.2 34.74,35.2 34.69,35.15 32.76,35.15 32.7,35.09 ; 34.31,2.1 33.53,2.89 33.53,8.88 35.2,10.56 35.2,11.5 34.42,12.28 R37.1 33.02,12.28 v1(33.02,12.29) ; v1(7.99,22.64) C46.1 8.88,22.4 9.73,21.56 14.05,21.56 ; R36.1 29.03,12.38 28.42,11.78 28.42,10.86 26.92,9.37 19.63,9.37 15.72,5.45 15.72,3.7 17.32,2.1 ; R4.2 15.36,22.77 14.1,21.51 ; U3.144 60.17,14.46 59.67,13.96 ; v1(60.47,29.22) 59.63,30.07 50.85,30.07 48.21,32.71 44.78,32.71 42.67,34.82 U3.72 ; 92.83,15.88 91.58,17.12 91.58,19.24 90.8,20.02 88.19,20.02 87.63,20.58 C18.2 v1(86.68,20.86) ; 75.17,15.88 74.35,16.7 74.35,17.61 73.44,18.51 72.42,18.51 71.86,19.07 C20.2 71.3,20.01 U3.6 ; C56.2 93.85,21.85 R17.1 ; C56.2 95.42,22.26 96.08,21.6 96.08,17.16 97.36,15.88 ; U3.17 v1(64.33,25.51) ; R39.1 v1(33.47,16.93) ; v1(76.15,22.69) C17.2 77.67,21.88 79.62,21.88 80.37,21.12 80.37,16.59 81.09,15.88 ; v1(71.07,17.54) C21.2 71.86,16.85 72.83,15.88 ; U3.32 63.73,33.01 64.46,32.28 v1(64.46,32.15) 64.33,32.01 U3.30 ; 59.67,13.96 U3.143 ; 89.01,15.88 87.31,14.18 C48.1 87.31,7.13 H5.1 ; L1.1 84.25,19.44 85,18.7 85,17.03 86.15,15.88 ; U3.52 52.67,35.61 56.98,31.3 v1(58.64,31.3) ; v1(67.4,13.24) 67.56,13.24 C29.2 70.53,13.11 70.53,15.88
  TOP w0.305: v1(6.25,46.93) 6.34,46.84 6.87,46.84 R61.1 7.74,45.97 C89.1 7.75,44.43 7.75,41.52 12.65,36.62 12.65,34.06 ; U18.8 v1(3.26,47.49) ; 24.43,35.2 25.19,34.44 25.19,33.11 23.88,31.81 C30.2 ; U4.24 22.63,31.81 C30.2 ; 34.4,32.67 33.84,32.11 U5.24 ; 34.4,32.67 34.4,30.99 34,30.59 32.36,30.59 31.98,30.97 U5.23 ; 34.4,32.67 C31.2 33.74,33.2 32.7,34.25 32.7,35.09 ; C30.2 22.98,30.92 21.95,30.92 21.68,31.2 U4.23
  TOP w0.381: C72.1 114.59,43.64 116.37,41.86 U10.25 U10.24 ; C72.1 114.59,45.57 115.47,46.45 v1(122.5,46.45) ; C72.1 R60.2 ; v1(109.47,9.69) 109.47,10.99 ; C3.2 16.78,24.17 R4.2
  TOP w0.508: 109.55,11.95 109.63,11.88 109.63,11.14 109.52,11.04 109.52,10.95 ; 32.7,35.09 32.59,35.2 13.78,35.2 12.65,34.06 12.65,22.95 14.68,20.92 14.68,18.41 8.84,12.57 8.84,3.96 10.69,2.1 101.85,2.1 103.35,3.6 103.35,6.08 107.92,10.65 102.69,15.88 65.57,15.88 64.99,15.29
  TOP w0.635: 109.6,13.41 109.57,13.45 109.57,14.58 C71.1 109.69,14.68 U14.1 ; 109.6,13.41 U14.2 ; 109.6,13.41 109.55,13.35 109.55,11.95 C70.1 109.47,11.09 109.52,11.04 109.13,10.65 107.92,10.65
  BOTTOM w0.254: v1(58.64,31.3) 59.04,31.3 61.59,33.85 67.28,33.85 68.5,32.63 80.88,32.63 84.19,29.33 84.19,19.88 v1(86.78,17.28) ; v1(71.16,21.37) 69.25,23.27 59.64,23.27 58.29,24.62 v1(58.29,27.83) ; v1(33.47,16.93) 33.47,16.89 34.06,16.3 34.06,13.43 33.02,12.39 v1(33.02,12.29) ; v1(76.21,17.54) 76.18,17.51 75.27,17.51 73.36,19.42 73.36,23.48 73.4,23.52 73.4,24.25 71.58,26.07 64.89,26.07 v1(64.33,25.51) ; v1(81.06,17.48) 81.06,21.72 77.97,24.8 77.97,31.01 77.37,31.62 65.13,31.62 64.59,32.15 v1(64.46,32.15) ; v1(67.4,13.24) 62.93,17.72 v1(55.13,17.72) ; H3.1 1.98,28.64 v1(7.99,22.64) ; v1(86.68,20.86) 86.68,22.3 85.34,23.65 85.34,29.89 81.22,34 v1(71.25,34) ; v1(56.49,24.01) 57.78,24.01 59.2,22.6 68.29,22.6 71.07,19.82 v1(71.07,17.54) ; H1.1 3.34,20.75 14.86,20.75 16.87,18.74 v1(19.91,18.74) ; v1(60.47,29.22) 60.57,29.13 71.64,29.13 74.87,25.9 74.87,20.62 v1(76.23,19.26) ; v1(36.58,38.37) 37.52,37.43 40.91,37.43 44.54,41.05 U8.2 ; H2.1 6.98,33.81 6.98,31.57 8.15,30.4 v1(8.18,30.4) ; v1(60.56,30.58) 72.38,30.58 76.15,26.81 v1(76.15,22.69)
  BOTTOM w0.305: v1(3.26,47.49) 3.26,47.49 3.88,46.86 6.19,46.86 v1(6.25,46.93)
  BOTTOM w0.381: v1(122.5,46.45) 123.14,45.81 123.14,13.89 118.95,9.69 v1(109.47,9.69)
BOOT0: length 22.5
  TOP w0.254: v1(71.02,23.18) 71.85,23.18 R18.2 ; U3.138 57.17,21.61 v1(60.01,24.45)
  BOTTOM w0.254: v1(71.02,23.18) 69.76,24.45 v1(60.01,24.45)
BOOT1: length 49.1
  TOP w0.254: R19.2 87.57,19.01 v1(86.71,19.01) ; v1(58.17,31.88) 57.06,31.88 54.67,34.27 U3.48
  BOTTOM w0.254: v1(58.17,31.88) 58.97,31.88 61.39,34.31 67.92,34.31 69.06,33.17 81.3,33.17 84.75,29.71 84.75,20.97 v1(86.71,19.01)
OSC_IN: length 10.9
  TOP w0.254: U3.23 65.02,28.51 R15.2 65.46,27.09 C15.1 68.27,26.37 69.3,26.37 69.87,26.94 O1.1
OSC_OUT: length 9.9
  TOP w0.254: 67.34,32.17 66.59,32.17 65.46,31.04 R15.1 65,29.01 U3.24 ; 67.34,32.17 67.87,31.64 O1.3 ; 67.34,32.17 C16.2
RELAYC: length 11.7
  TOP w0.254: U7.21 41.39,51.79 41.39,48.54 v1(39.52,46.67) ; R40.1 v1(36.88,43)
  BOTTOM w0.254: v1(36.88,43) 36.88,44.03 v1(39.52,46.67)
TCK: length 82.9
  TOP w0.254: U3.109 42.67,17.32 44.53,19.17 52.46,19.17 53,18.63 v1(53,18.61) ; R16.1 v1(94.95,18.65)
  BOTTOM w0.254: v1(94.95,18.65) 99.88,18.65 101.32,17.21 101.32,12.76 J1.1 101.48,10.31 99.59,10.31 99.58,10.31 58.69,10.31 58.68,10.31 58.06,10.31 53.82,14.55 53.82,17.79 v1(53,18.61)
TMS: length 78.4
  TOP w0.254: R17.2 v1(93.85,19.68) ; U3.105 42.12,19.01 43.98,20.87 v1(52.58,20.87)
  BOTTOM w0.254: v1(52.58,20.87) 52.58,20.85 54.42,19 54.42,15.22 58.88,10.76 99.39,10.76 J1.2 93.85,17.69 v1(93.85,19.68)
VCAP_1: length 9.1
  TOP w0.254: v1(43.46,35.27) 43.46,35.32 43.17,35.61 U3.71 ; v1(37.46,35.2) 36.87,34.6 C13.2
  BOTTOM w0.254: v1(37.46,35.2) 37.52,35.25 43.43,35.25 v1(43.46,35.27)
VCAP_2: length 23.9
  TOP w0.254: C14.2 v1(57.59,13.06) ; U3.106 42.34,18.51 44.07,20.25 53.73,20.25 56.13,17.85 v1(56.13,16.78)
  BOTTOM w0.254: v1(57.59,13.06) 56.11,14.54 56.11,16.76 v1(56.13,16.78)
N00261: length 11.1
  TOP w0.254: R1.2 34.2,24.34 arc(34.69,24.25) 35.1,23.97 37.69,21.38 arc(38.1,21.11) 38.59,21.01 U3.101
N00265: length 31.5
  TOP w0.254: U3.41 58.17,38.54 arc(58.27,39.02) 58.54,39.43 59.21,40.1 arc(59.62,40.38) 60.11,40.47 67.94,40.47 arc(68.43,40.38) 68.84,40.1 72.38,36.56 arc(72.66,36.15) 72.75,35.66 72.75,31.57 arc(72.85,31.09) 73.13,30.68 76.86,26.95 arc(77.68,26.61) R11.2
N00269: length 34
  TOP w0.254: U3.40 58.67,37.86 arc(58.77,38.34) 59.04,38.76 59.6,39.31 arc(60.01,39.58) 60.49,39.68 67.38,39.68 arc(67.87,39.58) 68.28,39.31 71.52,36.07 arc(71.79,35.66) 71.89,35.18 71.89,31.2 arc(71.99,30.72) 72.26,30.31 76.4,26.17 arc(76.81,25.89) 77.3,25.8 80.28,25.8 arc(80.77,25.89) 81.18,26.17 R13.1
N00322: length 26.9
  TOP w0.254: U3.82 42.28,30.51 v1(42.47,30.32) ; v1(20.81,30.27) 20.81,30.85 20.38,31.28 U4.21
  BOTTOM w0.254: v1(20.81,30.27) 22.06,29.01 41.79,29.01 42.47,29.69 v1(42.47,30.32)
N00366: length 27.4
  TOP w0.254: v1(20.09,30.27) 20.09,30.85 19.73,31.22 U4.20 ; U3.93 v1(41.99,25.01)
  BOTTOM w0.254: v1(20.09,30.27) 20.09,30.15 21.95,28.3 38.7,28.3 v1(41.99,25.01)
N00370: length 24.7
  TOP w0.254: v1(19.38,30.27) 19.38,30.85 19.08,31.16 U4.19 ; U3.87 38.74,28.01 38.32,27.59 v1(37.73,27.59)
  BOTTOM w0.254: v1(37.73,27.59) 21.95,27.59 19.38,30.15 v1(19.38,30.27)
N00374: length 25.7
  TOP w0.254: v1(18.67,30.27) 18.67,30.85 18.43,31.1 U4.18 ; U3.88 38.95,27.51 38.32,26.88 v1(37.73,26.88)
  BOTTOM w0.254: v1(37.73,26.88) 21.95,26.88 18.67,30.15 v1(18.67,30.27)
N00378: length 27.6
  TOP w0.254: v1(17.96,30.27) 17.96,30.85 17.78,31.04 U4.17 ; U3.91 39.58,26.01 38.32,24.75 v1(37.73,24.75)
  BOTTOM w0.254: v1(37.73,24.75) 23.28,24.75 17.96,30.06 v1(17.96,30.27)
N00382: length 28.8
  TOP w0.254: U4.16 17.13,30.97 17.25,30.85 v1(17.25,30.27) ; U3.92 39.73,25.51 38.25,24.03 v1(37.73,24.03)
  BOTTOM w0.254: v1(37.73,24.03) 23.15,24.03 17.25,29.93 v1(17.25,30.27)
N00386: length 29.4
  TOP w0.254: U4.15 16.48,30.91 16.54,30.85 v1(16.54,30.27) ; v1(37.38,23.04) 37.99,23.46 38.05,23.51 U3.96
  BOTTOM w0.254: v1(16.54,30.27) 16.54,29.93 23.42,23.04 v1(37.38,23.04)
N00394: length 30.4
  TOP w0.254: U3.97 38.35,23.01 v1(37.88,22.54) ; U4.14 v1(15.83,30.27)
  BOTTOM w0.254: v1(15.83,30.27) 15.83,29.9 23.27,22.46 37.8,22.46 v1(37.88,22.54)
N00427: length 18.4
  TOP w0.254: U5.14 26.13,30.38 v1(26.16,30.35) ; v1(37.85,30.4) 37.85,30.5 39.13,31.78 39.13,32.95 39.69,33.51 U3.76
  BOTTOM w0.254: v1(37.85,30.4) 26.21,30.4 v1(26.16,30.35)
N00431: length 37.1
  TOP w0.254: U5.15 v1(26.78,34.44) ; U3.47 v1(55.17,39.01)
  BOTTOM w0.254: v1(26.78,34.44) 26.78,34.65 29.03,36.9 44.58,36.9 47.32,34.16 50.32,34.16 v1(55.17,39.01)
N00435: length 16.3
  TOP w0.254: v1(27.43,29.69) U5.16 ; v1(37.87,29.66) 38.05,29.66 39.4,31.01 U3.81
  BOTTOM w0.254: v1(37.87,29.66) 27.46,29.66 v1(27.43,29.69)
N00439: length 45.3
  TOP w0.254: v1(21.03,20.26) 24.26,23.49 26.67,23.49 27.46,22.7 R31.1 C34.2 27.82,20.06 28.66,20.06 v1(28.68,20.04) ; U3.103 37.48,20.01 v1(37.45,20.04)
  BOTTOM w0.254: v1(21.03,20.26) 17.02,20.26 15.23,22.05 6.03,22.05 H1.3 ; v1(37.45,20.04) v1(28.68,20.04)
N00443: length 44.7
  TOP w0.254: v1(29.31,19.33) 28.07,19.33 C35.2 R54.1 27.46,16.58 27.05,16.17 23.55,16.17 v1(20.22,19.5) ; U3.104 38.04,19.51 v1(37.92,19.39)
  BOTTOM w0.254: v1(37.92,19.39) 37.86,19.33 v1(29.31,19.33) ; v1(20.22,19.5) 16.92,19.5 14.96,21.46 4.63,21.46 H1.2
N00447: length 56
  TOP w0.254: v1(44.5,27.04) 44.47,27.01 U3.89 ; v1(11.02,35.07) 10.29,35.07 R32.1 10.28,35.06 C36.2 10.28,37.11 v1(9.52,37.86)
  BOTTOM w0.254: H2.3 2.03,42.87 4.52,42.87 v1(9.52,37.86) ; v1(44.5,27.04) 44.58,27.13 44.58,30.16 43.1,31.64 14.45,31.64 v1(11.02,35.07)
N00451: length 56.3
  TOP w0.254: C37.2 R55.1 v1(11.17,31.96) ; C37.2 10.3,33.5 ; C37.2 v1(10.95,33.51) ; v1(43.45,26.43) 43.36,26.51 U3.90
  BOTTOM w0.254: 11.17,31.89 v1(11.17,31.96) 12.12,31.01 42.87,31.01 43.85,30.03 43.85,26.89 43.45,26.48 v1(43.45,26.43) ; v1(10.95,33.51) 10.93,33.51 9.7,34.74 9.7,36.67 5.55,40.82 H2.2
N00455: length 47.8
  TOP w0.254: v1(11.02,28.86) 10.3,28.86 C38.2 R33.1 v1(10.95,27.3) ; U3.98 38.98,22.51 v1(38.42,21.95)
  BOTTOM w0.254: v1(38.42,21.95) 18.64,21.95 13.29,27.3 v1(10.95,27.3) 11.02,27.23 11.14,27.23 ; H3.3 5.03,34.46 6.43,33.06 6.43,31.29 8.18,29.53 10.35,29.53 v1(11.02,28.86)
N00459: length 45.9
  TOP w0.254: v1(39.4,21.74) 39.67,22.01 U3.99 ; v1(10.95,24.19) R56.1 C39.2 10.3,25.76 v1(10.95,25.76)
  BOTTOM w0.254: v1(39.4,21.74) 39.02,21.36 17.06,21.36 14.23,24.19 v1(10.95,24.19) 10.89,24.19 ; H3.2 6.33,28.11 8.56,28.11 10.91,25.76 v1(10.95,25.76)
N00463: length 35.6
  TOP w0.254: v1(65.54,21.09) 64.11,22.51 U3.11 ; v1(72.31,14.63) 72.31,13.65 C40.2 72.3,11.98 R34.1 72.3,11.93 71.05,11.93 68.48,9.36 61.14,9.36 57.98,6.19 H4.3
  BOTTOM w0.254: v1(65.54,21.09) 65.54,19.93 70.84,14.63 v1(72.31,14.63)
N00467: length 32.7
  TOP w0.254: v1(74.53,13.73) 75.22,13.73 C41.2 R57.1 75.31,11.56 72.6,8.85 68.16,8.85 63.39,4.09 63.16,4.09 H4.2 ; U3.3 66.1,18.51 v1(67.56,17.05)
  BOTTOM w0.254: v1(74.53,13.73) 70.78,13.73 67.56,16.95 v1(67.56,17.05)
N00471: length 38.5
  TOP w0.254: v1(66.5,21.22) 64.71,23.01 U3.12 ; v1(81.3,14.89) 81.3,13.65 C42.2 R35.1 81.31,10.81 78.57,8.06 76.09,8.06 74.22,6.19 H5.3
  BOTTOM w0.254: v1(81.3,14.89) 80.72,15.47 70.8,15.47 66.5,19.77 v1(66.5,21.22)
N00475: length 40
  TOP w0.254: v1(66.63,16.77) 65.38,18.01 U3.2 ; H5.2 79.3,4.8 85.71,11.21 R58.1 C43.2 85.69,13.66 v1(85.69,14.98)
  BOTTOM w0.254: v1(66.63,16.77) 66.63,16.58 70.18,13.03 83.75,13.03 v1(85.69,14.98)
N00479: length 45.2
  TOP w0.254: v1(67.43,21.3) 65.22,23.51 U3.13 ; H6.3 91.72,5.45 R41.1 C49.2 91.7,13.66 v1(91.7,14.79)
  BOTTOM w0.254: v1(91.7,14.79) 90.51,15.98 71.19,15.98 67.43,19.74 v1(67.43,21.3)
N00483: length 46.9
  TOP w0.254: v1(95.58,13.8) 94.88,13.8 C50.2 R59.1 94.72,5.64 95.54,4.83 H6.2 ; v1(65.45,16.73) 64.67,17.51 U3.1
  BOTTOM w0.254: v1(95.58,13.8) 94.25,12.47 77.73,12.47 77.66,12.54 77.18,12.54 77.11,12.47 69.67,12.47 65.45,16.68 v1(65.45,16.73)
N00487: length 41.7
  TOP w0.254: U3.116 46.17,13.05 45.44,12.32 41.35,12.32 39.73,13.94 28.94,13.94 C52.1 27.36,12.39 26.29,12.39 24.49,10.59 17.53,10.59 13.14,6.19 H7.2
N00491: length 31.4
  TOP w0.254: U3.117 46.67,12.84 45.69,11.86 40.64,11.86 39.14,13.35 32.98,13.35 C53.1 30.63,11 30.63,8.43 26.4,4.19 H8.2
N00495: length 17.9
  TOP w0.254: v1(43.93,13.57) 44.17,13.81 U3.112 ; v1(37.34,11.91) 37.28,11.91 C54.1 35.46,10.09 H9.2
  BOTTOM w0.254: v1(37.34,11.91) 42.27,11.91 v1(43.93,13.57)
N00499: length 21.9
  TOP w0.254: U3.125 50.67,17.22 50.01,17.89 45.19,17.89 v1(45.19,17.89) ; v1(32.56,18.74) 32.51,18.74 R46.2
  BOTTOM w0.254: v1(45.19,17.89) 45.18,17.89 40.93,17.89 40.08,18.74 32.56,18.74 v1(32.56,18.74)
N00503: length 24
  TOP w0.254: Q1.3 34.27,18.33 R39.2 C51.1 34.91,15.94 v1(35.81,15.94) ; v1(43.71,17.25) 45.03,18.57 50.41,18.57 51.17,17.81 U3.126
  BOTTOM w0.254: v1(35.81,15.94) 42.41,15.94 v1(43.71,17.25)
N00507: length 21
  TOP w0.254: v1(39.52,38.35) 39.12,37.94 39.12,35.12 39.72,34.51 U3.74
  BOTTOM w0.254: v1(39.52,38.35) 39.52,42.44 40.82,43.73 47.06,43.73 U8.4
N00511: length 15.8
  TOP w0.254: U3.73 40.09,35.01 39.75,35.35 39.75,37.36 40.4,38.01 v1(40.41,38.01)
  BOTTOM w0.254: U8.3 45.25,43 41.6,43 40.41,41.8 v1(40.41,38.01)
N00515: length 6.3
  TOP w0.254: U8.6 54.03,41.17 50.67,37.81 U3.56
N00519: length 5
  TOP w0.254: U3.57 50.17,37.98 52.16,39.97 U8.5
N00543: length 34
  TOP w0.254: v1(89.74,25.45) 89.74,26.53 89,27.27 U11.6 85.68,27.27 82.88,24.48 69.99,24.48 69.18,23.66 65.91,23.66 65.56,24.01 U3.14 ; v1(89.74,23.32) 89.74,22.72 R44.2
  BOTTOM w0.254: v1(89.74,25.45) v1(89.74,23.32)
N00553: length 33.6
  TOP w0.254: U11.5 86.82,28.54 v1(86.19,27.91) 85.52,27.91 82.56,24.94 69.76,24.94 68.99,24.17 66.4,24.17 66.01,24.56 62.17,24.56 U3.15 ; R45.2 87.49,22.27 v1(87.49,23.18)
  BOTTOM w0.254: v1(87.49,23.18) 86.19,24.48 v1(86.19,27.91)
N000601: length 10.4
  TOP w0.254: R1.1 29.35,24.23 25.23,24.23 arc(24.78,24.41) 24.6,24.86 24.6,26.95 arc(24.42,27.36) 24.01,27.53 U1.2
N001382: length 5.1
  TOP w0.305: U4.3 21.03,38.42 21.83,39.22 23.44,39.22 24.3,40.08 R27.2
N001383: length 4
  TOP w0.305: U4.4 20.38,38.53 22.46,40.62 R26.2
N001384: length 3.4
  TOP w0.305: R23.2 19.73,39.08 U4.5
N001385: length 3.1
  TOP w0.305: U4.6 19.08,39.95 R25.2
N001386: length 2.9
  TOP w0.305: U4.7 18.43,40.42 R22.2
N001387: length 3.2
  TOP w0.305: R21.2 17.78,39.55 U4.8
N001388: length 3.7
  TOP w0.305: U4.9 17.13,38.95 15.46,40.62 R24.2
N001389: length 4.5
  TOP w0.305: U4.10 16.48,38.74 15.46,39.76 14.53,39.76 R20.2
N001987: length 4.7
  TOP w0.305: R28.1 30.9,40.21 30.09,39.41 28.82,39.41 28.08,38.67 U5.8
N001988: length 3.4
  TOP w0.305: R29.1 27.43,39.14 U5.9
N001989: length 2.8
  TOP w0.305: U5.10 26.78,40.47 R30.1
N11642: length 59.6
  TOP w0.254: v1(46.22,28.64) 46.22,28.64 45.85,29.01 U3.85
  BOTTOM w0.254: U10.6 89.82,40.58 85.5,40.58 83.69,42.39 59.44,42.39 50.24,33.19 47.14,33.19 46.22,32.27 v1(46.22,28.64)
N11646: length 62.3
  TOP w0.254: v1(46.86,28.06) 45.9,28.06 45.45,28.51 U3.86
  BOTTOM w0.254: v1(46.86,28.06) 46.86,32.14 47.39,32.67 48.82,32.67 48.83,32.66 53.72,32.66 59.03,37.97 91.67,37.97 92.38,38.68 92.38,40.62 U10.7
N11650: length 63
  TOP w0.254: U10.8 92.38,38.08 v1(92.38,35.45) ; U3.114 v1(45.17,17.11)
  BOTTOM w0.254: v1(45.17,17.11) 45.24,17.11 47.95,19.83 47.95,23.69 59.71,35.45 v1(92.38,35.45)
N11654: length 68.8
  TOP w0.254: U3.115 45.67,16.56 v1(46.23,17.11)
  BOTTOM w0.254: U10.9 97.48,40.54 97.48,37.43 94.82,34.77 59.87,34.77 48.41,23.31 48.41,19.3 v1(46.23,17.11)
N11658: length 54.8
  TOP w0.254: U3.58 v1(49.67,35.71)
  BOTTOM w0.254: v1(49.67,35.71) 49.67,35.77 53.54,39.64 53.54,41.7 54.8,42.96 94.44,42.96 94.92,42.47 94.92,40.7 96.28,39.34 96.27,39.32 U10.10
N11662: length 55
  TOP w0.254: v1(50.19,39.21) 49.17,38.19 U3.59
  BOTTOM w0.254: U10.11 97.14,43.42 51.96,43.42 51.08,42.53 51.08,40.1 v1(50.19,39.21)
N11666: length 61.6
  TOP w0.254: v1(50.93,43.81) 50.93,40.84 48.67,38.58 U3.60
  BOTTOM w0.254: U10.12 99.97,40.6 99.97,43 98.92,44.05 51.09,44.05 50.93,43.89 v1(50.93,43.81)
N11670: length 61.6
  TOP w0.254: v1(49.71,43.74) 49.71,43.62 48.36,42.27 48.36,40.48 47.17,39.29 U3.63
  BOTTOM w0.254: U10.13 101.24,42.95 99.44,44.75 50.72,44.75 v1(49.71,43.74)
N11674: length 69
  TOP w0.254: v1(49.26,44.47) 48.43,43.64 46.95,43.64 45.83,42.52 45.83,40.27 46.67,39.43 U3.64
  BOTTOM w0.254: U10.14 102.51,40.6 102.51,43.15 100.31,45.35 50.14,45.35 v1(49.26,44.47)
N11678: length 76.6
  TOP w0.254: U3.65 46.17,38.94 45.04,40.07 41.26,40.07 40.86,40.47 40.86,41.87 43.39,44.4 v1(48.28,44.4)
  BOTTOM w0.254: v1(48.28,44.4) 49.76,45.89 101.58,45.89 103.78,43.69 U10.15
N11682: length 82
  TOP w0.254: U3.66 45.67,38.58 44.68,39.57 41.08,39.57 40.36,40.29 40.36,42.06 43.42,45.11 48.16,45.11 v1(48.22,45.17)
  BOTTOM w0.254: v1(48.22,45.17) 48.33,45.17 49.67,46.5 102.23,46.5 105.1,43.63 105.1,40.65 U10.16
N11686: length 81.5
  TOP w0.254: v1(48.22,45.88) 48.1,45.76 43.26,45.76 39.86,42.37 39.86,40.14 40.93,39.07 44.39,39.07 45.17,38.29 U3.67
  BOTTOM w0.254: v1(48.22,45.88) 48.33,45.88 49.63,47.18 102.72,47.18 106.44,43.46 106.44,41.88 106.43,41.86 U10.17
N11690: length 86.5
  TOP w0.254: v1(47.98,46.68) 47.6,46.3 42.98,46.3 39.36,42.68 39.36,39.93 40.72,38.57 43.96,38.57 44.67,37.86 U3.68
  BOTTOM w0.254: U10.18 106.43,39.32 107.62,40.51 107.62,43.22 103.12,47.72 49.02,47.72 v1(47.98,46.68)
N11694: length 73.7
  TOP w0.254: U3.77 43.7,33.01 44.69,32.02 47.72,32.02 v1(47.72,32.02) ; U10.19 107.57,40.57 107.57,38.7 106.02,37.15 v1(94.06,37.15)
  BOTTOM w0.254: v1(47.72,32.02) 47.73,32.02 47.8,32.1 54.08,32.1 59.13,37.15 v1(94.06,37.15)
N11698: length 72.1
  TOP w0.254: U10.20 108.86,39.08 106.35,36.57 v1(93.5,36.57) 93.53,36.53 ; U3.78 43.38,32.51 44.45,31.44 48.16,31.44 v1(48.22,31.5)
  BOTTOM w0.254: v1(48.22,31.5) 54.27,31.5 59.37,36.6 93.42,36.6 93.46,36.57 v1(93.5,36.57)
N11702: length 77.5
  TOP w0.254: U10.21 110.8,41.27 110.77,41.27 110.31,40.81 110.31,37.94 108.34,35.97 v1(93.05,35.97) ; v1(47.91,30.85) 47.91,30.86 47.89,30.88 44.07,30.88 42.94,32.01 U3.79
  BOTTOM w0.254: v1(93.05,35.97) 92.99,36.04 59.61,36.04 54.43,30.85 v1(47.91,30.85)
N11706: length 35.4
  TOP w0.254: U3.50 53.67,38.37 56.16,40.86 v1(58.78,40.86)
  BOTTOM w0.254: U10.2 85.71,39.32 84.18,40.86 v1(58.78,40.86)
N11710: length 99.6
  TOP w0.254: U3.118 47.17,12.36 v1(50.24,9.29) ; v1(93.31,33.7) 93.2,33.7 88.54,38.36 U10.4
  BOTTOM w0.254: v1(50.24,9.29) 50.32,9.29 51.36,8.25 93.35,8.25 93.4,8.3 102.97,8.3 105.13,10.46 105.13,19.98 93.31,31.81 v1(93.31,33.7)
N11714: length 97.8
  TOP w0.254: v1(91.03,33.72) 91.03,33.93 87.53,37.43 85.9,37.43 84.68,38.65 84.68,40.55 U10.1 ; v1(52.76,11.5) 51.67,12.58 U3.127
  BOTTOM w0.254: v1(91.03,33.72) 91.03,32.61 104.01,19.63 104.01,10.92 102.41,9.32 54.91,9.32 52.76,11.47 v1(52.76,11.5)
N11718: length 100.4
  TOP w0.254: U3.119 47.67,13.81 v1(51.13,10.36) ; v1(92.06,33.76) 87.27,38.55 87.27,40.6 U10.3
  BOTTOM w0.254: v1(51.13,10.36) 51.23,10.36 52.82,8.77 102.61,8.77 104.62,10.79 104.62,19.84 92.06,32.4 v1(92.06,33.76)
N11722: length 102
  TOP w0.254: U3.113 44.67,13.82 v1(45.16,13.33)
  BOTTOM w0.254: v1(45.16,13.33) 45.21,13.33 51.03,7.51 103.68,7.51 105.61,9.44 105.61,31.11 112.7,38.19 112.7,40.56 113.94,41.8 U10.23
N11726: length 37.5
  TOP w0.381: R6.2 77.39,36.2 C5.1 77.39,39.59 arc(77.53,40.32) 77.95,40.93 81.71,44.69 arc(82.33,45.11) 83.06,45.25 99,45.25 arc(99.72,45.4) 100.34,45.81 101.94,47.41 arc(102.35,48.03) 102.5,48.75 102.5,49.1 arc(102.64,49.83) 103.06,50.45 104.18,51.57 arc(104.47,51.76) 104.81,51.83 U6.15
N11738: length 33.8
  TOP w0.381: U6.2 106.63,48.94 102.02,44.32 arc(101.4,43.91) 100.67,43.76 85.01,43.76 arc(84.29,43.62) 83.67,43.21 80.91,40.45 arc(80.55,39.91) 80.42,39.28 C8.1 80.42,36.2 R7.1
N11750: length 29.7
  TOP w0.305: 38.59,51.81 U7.20
  TOP w0.381: R3.1 31.59,25.98 arc(32.19,26.1) 32.7,26.44 38.03,31.77 arc(38.44,32.39) 38.59,33.11 38.59,51.81
N18066: length 52.5
  TOP w0.254: U3.69 44.17,36.08 44.7,35.55 44.7,34.28 v1(44.4,33.98) ; U18.4 8.31,51.3 v1(9.45,50.16)
  BOTTOM w0.254: v1(44.4,33.98) 43.79,33.98 43.36,34.41 35.99,34.41 35.38,33.8 18.1,33.8 12.03,39.87 12.03,47.57 v1(9.45,50.16)
N18070: length 52.1
  TOP w0.254: v1(8.69,47.52) 7.45,47.52 U18.1 ; U3.70 43.67,35.94 44.04,35.57 v1(44.04,34.69)
  BOTTOM w0.254: v1(44.04,34.69) 44.51,34.69 44.98,34.22 44.98,33.29 44.32,32.63 17.37,32.63 9.45,40.56 9.45,46.75 v1(8.69,47.52)
